# Altium PCB Altium_PCB.pcbdoc
Units mil, origin at the board's own origin, x right, y up, seen from the top; angles counter-clockwise.
Board outline 7735 x 4742.5 mil, 2 copper layers (Top Layer, Bottom Layer); 18 components, 70 nets, 122 pads, 23 vias.
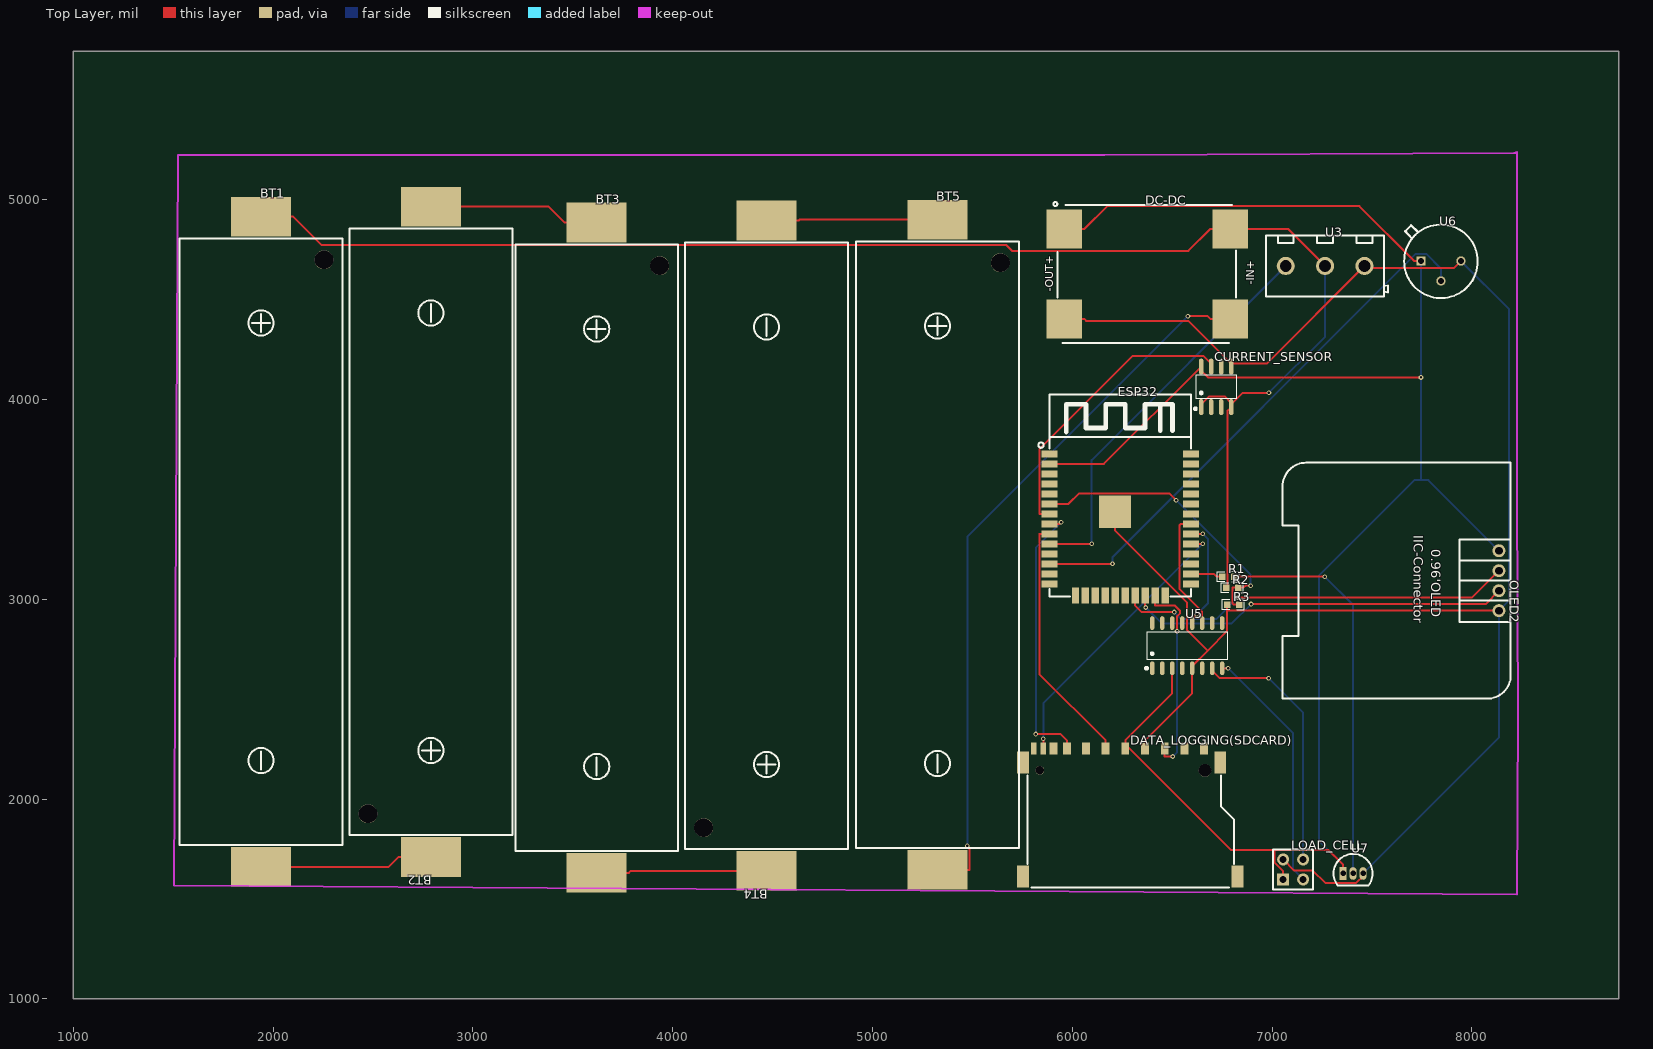
[diagram p0: Top Layer view]
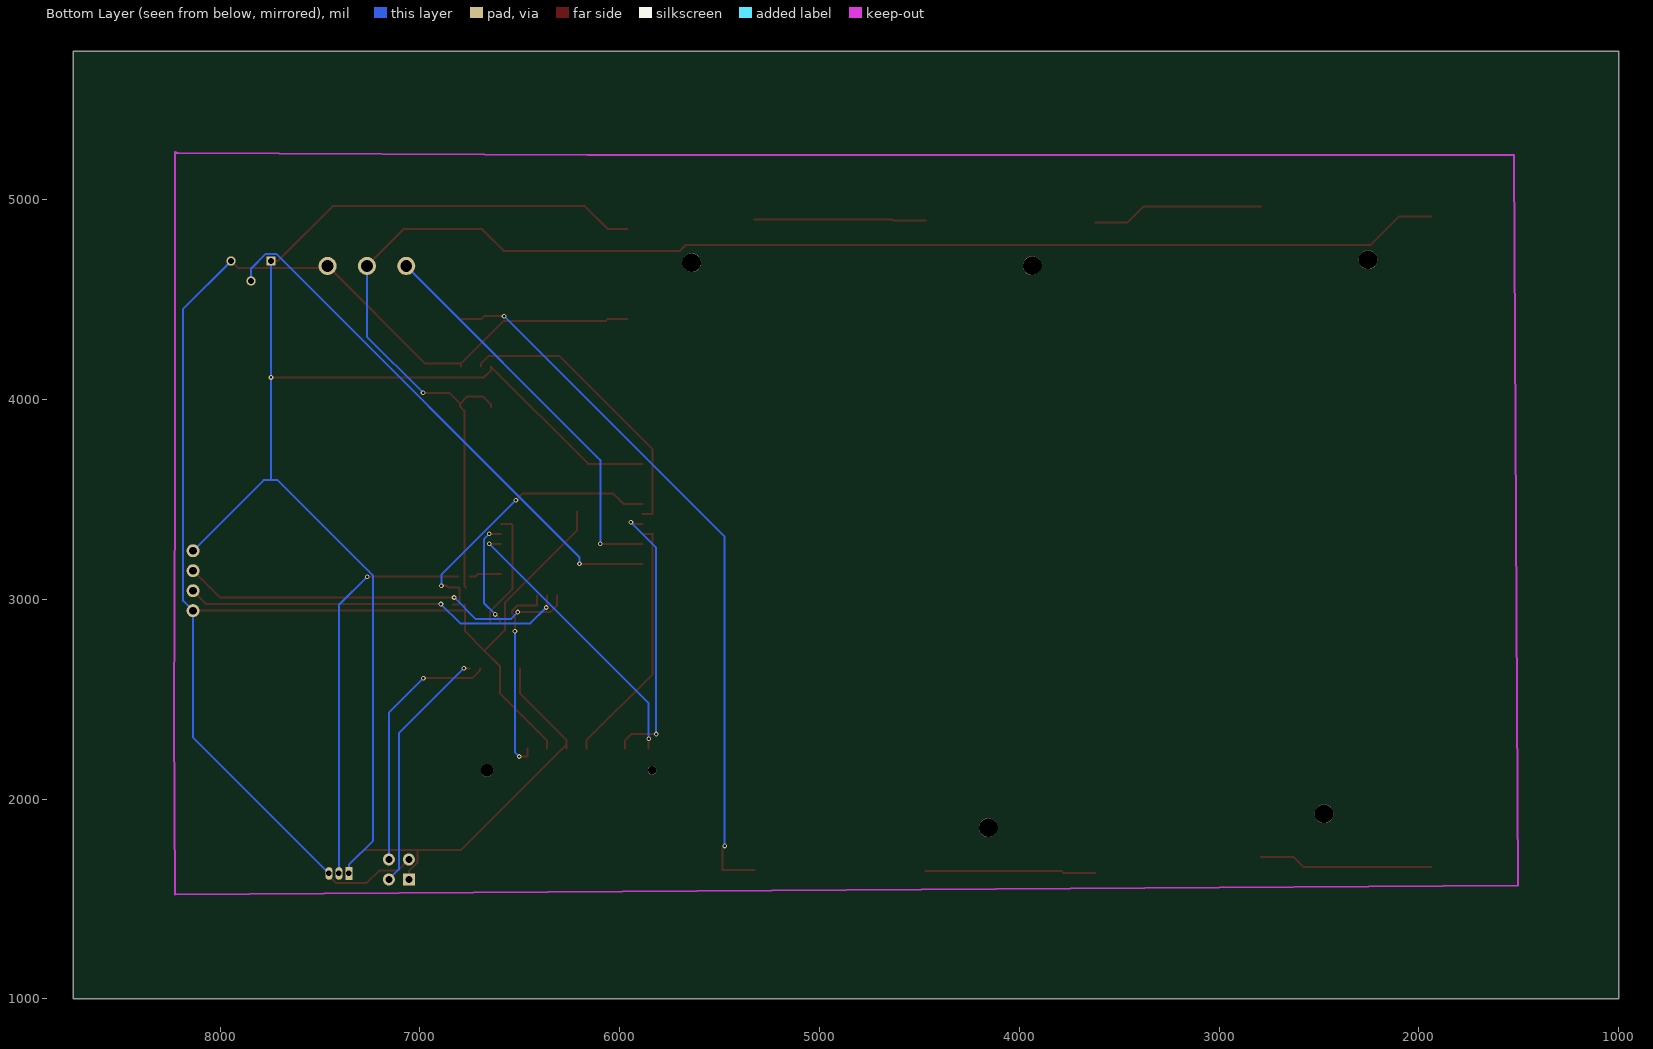
[diagram p1: Bottom Layer view, seen from below]

## Layer stack, top to bottom
Top Layer: signal copper (thickness not stored)
Dielectric: dielectric 12.6, FR-4, Dk 4.8
Bottom Layer: signal copper (thickness not stored)

## Board outline
8735,1000 1000,1000 1000,5742.5 8735,5742.5

## Components (designator, comment, footprint, x,y, rotation, side; value= is the part's Value field where it differs from the comment)
BT1 "BH-18650-B1BA002" BATTERY-SMD_18650-1S-L77.1-W20.7-1 1940,3287.5 r0 top
BT2 "BH-18650-B1BA002" BATTERY-SMD_18650-1S-L77.1-W20.7-1 2790,3337.5 r180 top
BT3 "BH-18650-B1BA002" BATTERY-SMD_18650-1S-L77.1-W20.7-1 3620,3257.5 r0 top
BT4 "BH-18650-B1BA002" BATTERY-SMD_18650-1S-L77.1-W20.7-1 4470,3267.5 r180 top
BT5 "BH-18650-B1BA002" BATTERY-SMD_18650-1S-L77.1-W20.7-1 5325,3272.5 r0 top
CURRENT_SENSOR "MCS1803GS-50-Z" SOIC-8_L4.9-W3.9-P1.27-LS6.0-BL 6720,4062.5 r0 top
DATA_LOGGING(SDCARD) "SD-CARD 11P" SD-CARD-SMD_SD-CARD-11P 6290,1932.5 r0 top
DC-DC "DC-DC-5V" PWRM-SMD_L22.0-W17.0_DC-DC-5V 6375,4627.5 r0 top
ESP32 "ESP32-WROOM-32(M103QH2800PH3Q0)" WIFIM-SMD_ESP32-WROOM-32-N4 6240,3372.5 r0 top
LOAD_CELL "load cell" HDR-F-2.54_2X2 7105,1647.5 r0 top
OLED2 "0.96OLED_4P" 0.96OLED_4P 8135,3092.5 r270 top
R1 "2.5k" R0603 6780,3112.5 r0 top
R2 "100k" R0603 6800,3057.5 r0 top
R3 "5.6k" R0603 6805,2972.5 r0 top
U3 "ESC Connector" CONN-TH_XY126V-5.0-3P 7265,4667.5 r0 top
U5 "HX711(Thrust_Sensor)" SOP-16_L10.0-W3.9-P1.27-LS6.0-BL 6575,2767.5 r0 top
U6 "RPM(IR)" TO-5-3_L8.2-W8.2 7845,4642.5 r0 top
U7 "TEMP" TO-92-3_L4.9-W3.7-P1.27-L 7405,1627.5 r0 top

## Footprints (in the part's own frame and the unit in brackets; to place one, negate y for a bottom-side part, rotate by r counter-clockwise, add the part's x,y. Pads: shape width x height; smd on the part's side, far side on the other; paste and mask are expansions set on the pad)
0.96OLED_4P [mm]
  round 1.65 hole 1 paste+0 mask+0.051: 1(-3.81,-0.001) 2(-1.27,0.002) 3(1.27,0.002) 4(3.81,0.002)
  silkscreen extent -15,-27.5 15,1.5
BATTERY-SMD_18650-1S-L77.1-W20.7-1 [mm]
  rect 7.62x5.08 smd paste+0 mask+0.051: 1(0,-41.313) 2(0,41.313)
  round 2.4 hole 2.4 unplated paste+0: ""(8,35.84)
  silkscreen extent -10.35,-38.54 10.35,38.54
CONN-TH_XY126V-5.0-3P [mm]
  round 2.3 hole 1.5 paste+0 mask+0.051: 1(-5,0) 2(0,0) 3(5,0)
  silkscreen extent -7.5,-3.9 8,3.9
HDR-F-2.54_2X2 [mil]
  rect 60x60 hole 36 paste+0 mask+2: 1(-50,-50)
  round 60 hole 36 paste+0 mask+2: 2(-50,50) 3(50,-50) 4(50,50)
  silkscreen extent -100,-100 100,100
PWRM-SMD_L22.0-W17.0_DC-DC-5V [mm]
  rect 4.5x5 smd paste+0 mask+0.05: 1(-10.541,5.715) 2(-10.541,-5.715) 3(10.541,-5.715) 4(10.541,5.715)
  silkscreen extent -11.94,-8.76 11.3,9.14
R0603 [mil]
  rect 31.75x34.02 smd paste-3937.01 mask+2: 1(-29.65,0) 2(29.65,0)
  silkscreen extent -55,-26 55,26
SD-CARD-SMD_SD-CARD-11P [mm]
  rect 1x1.5 smd paste+0 mask+0.05: 1(6.88,8.15) 2(4.38,8.15) 3(1.88,8.15) 4(-0.63,8.15) 5(-3.13,8.15) 6(-5.63,8.15) 7(-8.05,8.15) 8(-9.75,8.15) 9(9.38,8.15)
  rect 0.7x1.5 smd paste+0 mask+0.05: 10(-11.05,8.15) 11(-12.25,8.15)
  rect 1.5x2.8 smd paste+0 mask+0.05: 12(-13.65,6.35) 13(-13.65,-8.15) 14(13.65,-8.15) 15(11.45,6.35)
  round 1.1 hole 1.1 unplated paste+0: ""(-11.5,5.35)
  round 1.6 hole 1.6 unplated paste+0: ""(9.5,5.35)
  silkscreen extent -13.08,-9.54 13.21,4.72
SOIC-8_L4.9-W3.9-P1.27-LS6.0-BL [mm]
  oval 0.588x2.045 smd paste+0 mask+0.051: 1(-1.905,-2.57) 2(-0.635,-2.57) 3(0.635,-2.57) 4(1.905,-2.57) 5(1.905,2.57) 6(0.635,2.57) 7(-0.635,2.57) 8(-1.905,2.57)
  silkscreen extent -2.8,-2.92 2.53,1.52
SOP-16_L10.0-W3.9-P1.27-LS6.0-BL [mm]
  oval 0.56x1.745 smd paste+0 mask+0.051: 1(-4.445,-2.873) 2(-3.175,-2.873) 3(-1.905,-2.873) 4(-0.635,-2.873) 5(0.635,-2.873) 6(1.905,-2.873) 7(3.175,-2.873) 8(4.445,-2.873) 9(4.445,2.873) 10(3.175,2.873) 11(1.905,2.873) 12(0.635,2.873) 13(-0.635,2.873) 14(-1.905,2.873) 15(-3.175,2.873) 16(-4.445,2.873)
  silkscreen extent -5.33,-3.02 5.08,1.77
TO-5-3_L8.2-W8.2 [mil]
  rect 46x46 hole 28 paste+0 mask+2: 1(-100,50)
  round 46 hole 28 paste+0 mask+2: 2(0,-50) 3(100,50)
  silkscreen extent -184,-135 184,232
TO-92-3_L4.9-W3.7-P1.27-L [mm]
  rect 0.9x1.6 hole 0.7 paste+0 mask+0.051: 1(-1.27,0)
  oval 0.9x1.6 hole 0.7 paste+0 mask+0.051: 2(0,0) 3(1.27,0)
  silkscreen extent -2.48,-1.5 2.48,2.48
WIFIM-SMD_ESP32-WROOM-32-N4 [mm]
  rect 2x0.9 smd paste+0 mask+0.05: 1(-9,9.005) 2(-9,7.735) 3(-9,6.465) 4(-9,5.195) 5(-9,3.925) 6(-9,2.655) 7(-9,1.385) 8(-9,0.115) 9(-9,-1.155) 10(-9,-2.425) 11(-9,-3.695) 12(-9,-4.965) 13(-9,-6.235) 14(-9,-7.505) 25(9,-7.505) 26(9,-6.235) 27(9,-4.965) 28(9,-3.695) 29(9,-2.425) 30(9,-1.155) 31(9,0.115) 32(9,1.385) 33(9,2.655) 34(9,3.925) 35(9,5.195) 36(9,6.465) 37(9,7.735) 38(9,9.005)
  rect 0.9x2 smd paste+0 mask+0.05: 15(-5.715,-9.005) 16(-4.445,-9.005) 17(-3.175,-9.005) 18(-1.905,-9.005) 19(-0.635,-9.005) 20(0.635,-9.005) 21(1.905,-9.005) 22(3.175,-9.005) 23(4.445,-9.005) 24(5.715,-9.005)
  rect 4.1x4.1 smd paste+0 mask+0.05: 39(-0.68,1.665)
  silkscreen extent -10.41,-9.13 9.02,16.54

## Via types
v1: diameter 24, hole 12, Top Layer to Bottom Layer, tented both sides, 23 vias

## Nets (pads, with @x,y where several pads share a name; then routed paths per layer and width w, separated by ;. In a path a pad name is that pad's centre, name@x,y a point inside that pad or via, vN(x,y) a via of type N, cw(c..) or ccw(c..) an arc to the next point about the centre after c; other vN are vias at no path point)
3V3: CURRENT_SENSOR.8 DATA_LOGGING(SDCARD).4 DC-DC.1 ESP32.2 LOAD_CELL.1 OLED2.1 U5.3 U6.1 U7.1 | length 9968.1
  Top Layer w10: ESP32.2 6158.35,3677.03 CURRENT_SENSOR.8 6645,4143.8 6679.02,4109.78 v1(7745,4109.78) ; DC-DC.1 6059.59,4852.5 6174.03,4966.94 7436.55,4966.94 7710.99,4692.5 U6.1 ; 6265.2,2253.37 6265.2,2273.64 ; U5.3 6500,2528.71 6265.2,2293.91 6265.2,2273.64 ; LOAD_CELL.1 7055,1638.51 7012.16,1681.35 7012.16,1745.52 ; U7.1 7355,1670.01 7279.49,1745.52 7012.16,1745.52 ; 6265.2,2273.64 6793.32,1745.52 7012.16,1745.52
  Bottom Layer w10: U7.1 7355,1670.01 7235.79,1789.22 7235.79,3119.24 7712.02,3595.47 7745,3595.47 ; U6.1 v1(7745,4109.78) 7745,3595.47 ; OLED2.1 7781.98,3595.47 7745,3595.47
BT1_1: BT1.1 BT2.2 | length 870.7
  Top Layer w10: BT1.1 2578.99,1661 2628.99,1711 BT2.2
BT2_1: BT2.1 BT3.2 | length 863.1
  Top Layer w10: BT2.1 3378.99,4964 3458.99,4884 BT3.2
BT3_1: BT3.1 BT4.2 | length 854.1
  Top Layer w10: BT3.1 3781.01,1631 3791.01,1641 BT4.2
BT4_1: BT4.1 BT5.2 | length 857.1
  Top Layer w10: BT4.1 4631.01,4894 4636.01,4899 BT5.2
BT5_1: BT5.1 DC-DC.3 | length 3610.2
  Top Layer w10: BT5.1 5486.01,1646 5486.01,1753.81 v1(5474.37,1765.45) ; v1(6578.65,4416.04) 6676.87,4416.04 6690.41,4402.5 DC-DC.3
  Bottom Layer w10: v1(5474.37,1765.45) 5474.37,3311.76 v1(6578.65,4416.04)
CURRENT_SENSOR_2: CURRENT_SENSOR.2
CURRENT_SENSOR_3: CURRENT_SENSOR.3
CURRENT_SENSOR_6: CURRENT_SENSOR.6
DATA_LOGGING(SDCARD)_1: DATA_LOGGING(SDCARD).1
DATA_LOGGING(SDCARD)_6: DATA_LOGGING(SDCARD).6
DATA_LOGGING(SDCARD)_8: DATA_LOGGING(SDCARD).8
DATA_LOGGING(SDCARD)_9: DATA_LOGGING(SDCARD).9
DATA_LOGGING(SDCARD)_11: DATA_LOGGING(SDCARD).11
DATA_LOGGING(SDCARD)_12: DATA_LOGGING(SDCARD).12
DATA_LOGGING(SDCARD)_13: DATA_LOGGING(SDCARD).13
DATA_LOGGING(SDCARD)_14: DATA_LOGGING(SDCARD).14
DATA_LOGGING(SDCARD)_15: DATA_LOGGING(SDCARD).15
ESP32_1: ESP32.1
ESP32_3: ESP32.3
ESP32_4: ESP32.4
ESP32_5: ESP32.5
ESP32_10: ESP32.10 U3.1 | length 2004
  Top Layer w10: ESP32.10 v1(6096.97,3277.03)
  Bottom Layer w10: v1(6096.97,3277.03) 6096.97,3696.32 U3.1
ESP32_11: ESP32.11
ESP32_13: ESP32.13
ESP32_14: ESP32.14
ESP32_15: ESP32.15
ESP32_16: ESP32.16
ESP32_17: ESP32.17
ESP32_18: ESP32.18
ESP32_19: ESP32.19
ESP32_20: ESP32.20
ESP32_24: ESP32.24
ESP32_25: ESP32.25
ESP32_27: ESP32.27
ESP32_28: ESP32.28
ESP32_32: ESP32.32
ESP32_33: ESP32.33
ESP32_34: ESP32.34
ESP32_35: ESP32.35
ESP32_36: ESP32.36
ESP32_37: ESP32.37
ESP32_38: ESP32.38
GND: CURRENT_SENSOR.5 DATA_LOGGING(SDCARD).3 DC-DC.2 ESP32.39 LOAD_CELL.2 OLED2.4 R3.1 U3.3 U5.5 U6.3 U7.3 | length 9391.9
  Top Layer w10: DC-DC.2 6059.59,4402.5 6069.1,4392.99 6580.37,4392.99 CURRENT_SENSOR.5@6795,4178.36 ; ESP32.39 6213.23,3344.8 6575,2983.03 6575,2845.28 6677.27,2743.02 ; 6364.02,2253.37 6364.02,2293.91 6600,2529.89 U5.5 6600,2665.75 6677.27,2743.02 ; R3.1 6775.34,2942.5 ; CURRENT_SENSOR.5 CURRENT_SENSOR.5@6795,4178.36 ; LOAD_CELL.2 7110.68,1641.82 7204.26,1641.82 7266.14,1579.94 7420.61,1579.94 7455,1614.33 U7.3 ; U6.3 7910.94,4658.44 7470.91,4658.44 U3.3 6972.71,4178.36 CURRENT_SENSOR.5@6795,4178.36 ; OLED2.4@8135.05,2942.5 6775.34,2942.5 ; 6677.27,2743.02 6775.34,2841.09 6775.34,2942.5
  Bottom Layer w10: U7.3 8135.05,2307.55 8135.05,2942.5 8184.45,2991.9 8184.45,4453.05 U6.3
GPIO04: ESP32.26 R1.1 | length 162
  Top Layer w10: ESP32.26 6708.93,3127.03 6723.46,3112.5 R1.1
GPIO05: DATA_LOGGING(SDCARD).10 ESP32.29 | length 1412.7
  Top Layer w10: 5854.96,2253.37 v1(5854.96,2301.72) ; ESP32.29 6644.71,3277.03 v1(6652.89,3277.03)
  Bottom Layer w10: v1(5854.96,2301.72) 5854.96,2479.1 v1(6652.89,3277.03)
GPIO18: ESP32.30 U5.12 | length 549
  Top Layer w10: ESP32.30 6644.71,3327.03 v1(6652.42,3327.03) ; U5.12 6600,2900.99 v1(6622.98,2923.97)
  Bottom Layer w10: v1(6622.98,2923.97) 6679.94,2980.93 6679.94,3299.51 v1(6652.42,3327.03)
GPIO19: ESP32.31 U5.11 | length 596.1
  Top Layer w10: ESP32.31 6543.95,3377.03 6537.48,3370.56 6537.48,3050.09 6650,2937.57 U5.11
GPIO21: ESP32.21 OLED2.2 | length 1998.5
  Top Layer w10: ESP32.21 6315,2967.59 6347.19,2935.4 v1(6510.12,2935.4) ; v1(6828.53,3008.72) 8001.27,3008.72 OLED2.2@8135.05,3142.5
  Bottom Layer w10: v1(6510.12,2935.4) 6545.05,2900.47 6720.28,2900.47 v1(6828.53,3008.72)
GPIO22: ESP32.22 OLED2.3 | length 1929.2
  Top Layer w10: ESP32.22 6365,2960.53 v1(6367.06,2958.47) ; v1(6894.6,2975.61) 8068.16,2975.61 OLED2.3@8135.05,3042.5
  Bottom Layer w10: v1(6367.06,2958.47) 6446.82,2878.71 6797.7,2878.71 v1(6894.6,2975.61)
GPIO23: DATA_LOGGING(SDCARD).2 ESP32.23 | length 1009.6
  Top Layer w10: ESP32.23 6415,2967.59 6415.05,2967.54 6513.95,2967.54 6538.04,2943.45 6538.04,2928.26 6524.47,2914.69 v1(6524.47,2840) ; 6462.44,2253.37 6462.44,2212.83 v1(6502.99,2212.83)
  Bottom Layer w10: v1(6502.99,2212.83) 6524.47,2234.31 v1(6524.47,2840)
GPIO27: ESP32.12 U6.2 | length 2712.9
  Top Layer w10: ESP32.12 v1(6201.39,3177.03)
  Bottom Layer w10: v1(6201.39,3177.03) 6201.39,3211.15 7716.8,4726.56 7772.78,4726.56 7845,4654.34 U6.2
GPIO32: DATA_LOGGING(SDCARD).7 ESP32.8 | length 1383.1
  Top Layer w10: v1(5817.53,2325.02) 5941.96,2325.02 5973.07,2293.91 5973.07,2253.37 ; ESP32.8 5936.05,3377.03 v1(5944.07,3385.05)
  Bottom Layer w10: v1(5817.53,2325.02) 5817.53,3258.51 v1(5944.07,3385.05)
GPIO33: DATA_LOGGING(SDCARD).5 ESP32.9 | length 1261.4
  Top Layer w10: ESP32.9 5835.29,3327.03 5835.24,3326.98 5835.24,2625.44 6166.77,2293.91 6166.77,2253.37
GPIO34: ESP32.6 R2.2 R3.2 | length 1459.3
  Top Layer w10: ESP32.6 5981.06,3477.03 6033.84,3529.81 6484.74,3529.81 v1(6519.27,3495.28) ; R3.2 6807.77,2972.5 6802.77,2977.5 6802.77,3057.5 R2.2 6856.54,3057.5 6866.76,3067.72 v1(6892.1,3067.72)
  Bottom Layer w10: v1(6519.27,3495.28) 6892.1,3122.45 v1(6892.1,3067.72)
INNA: LOAD_CELL.4 U5.7 | length 1288.6
  Top Layer w10: U5.7 6700,2642.35 6737.91,2604.44 v1(6982.33,2604.44)
  Bottom Layer w10: v1(6982.33,2604.44) 7155,2431.77 LOAD_CELL.4
INPA: LOAD_CELL.3 U5.8 | length 1242.2
  Top Layer w10: U5.8 v1(6779.88,2654.41)
  Bottom Layer w10: v1(6779.88,2654.41) 7105,2329.29 7105,1647.5 LOAD_CELL.3
NETPORT3: BT1.2 CURRENT_SENSOR.1 CURRENT_SENSOR.4 DC-DC.4 R2.1 U3.2 | length 7609
  Top Layer w10: BT1.2 2101.01,4914 2242.07,4772.94 5668.34,4772.94 5698.26,4743.02 6580.93,4743.02 6690.41,4852.5 6740.21,4852.5 DC-DC.4 7080,4852.5 U3.2 ; CURRENT_SENSOR.1 6645,3975.78 6684.44,4015.22 6762.46,4015.22 CURRENT_SENSOR.4@6798.76,3978.92 ; R2.1 6777.28,3064.44 6777.28,3943.6 CURRENT_SENSOR.4 6798.76,3965.08 CURRENT_SENSOR.4@6798.76,3978.92 ; v1(6983.66,4032.94) 6852.78,4032.94 CURRENT_SENSOR.4@6798.76,3978.92
  Bottom Layer w10: v1(6983.66,4032.94) 7265,4314.28 U3.2
NETPORT4: CURRENT_SENSOR.7 ESP32.7 | length 1458.7
  Top Layer w10: ESP32.7 5835.29,3427.03 5835.24,3427.08 5835.24,3750.24 6303.17,4218.17 6655.84,4218.17 6695,4179.01 CURRENT_SENSOR.7
U5_1: U5.1
U5_2: U5.2
U5_4: U5.4
U5_6: U5.6
U5_9: U5.9
U5_10: U5.10
U5_13: U5.13
U5_14: U5.14
U5_15: U5.15
U5_16: U5.16
U7_2: R1.2 U7.2 | length 1997.5
  Top Layer w10: R1.2 v1(7263.51,3112.5)
  Bottom Layer w10: v1(7263.51,3112.5) 7405,2971.01 U7.2
pads on no net: BT1. BT2. BT3. BT4. BT5. DATA_LOGGING(SDCARD).

## Text inside footprints (layer, text, board x,y; h text height)
DC-DC: Top Overlay "-IN+" at 6909.69,4572.5 h39.37 r90; Top Overlay "-OUT+" at 5904.69,4537.5 h39.37 r90
OLED2: Top Overlay "IIC-Connector" at 7707.94,3319.1 h47.24 r270; Top Overlay "0.96'OLED" at 7796.43,3249.9 h47.24 r270